# Altium PCB pulseox-main-PCB.PcbDoc
Units mm, origin at the board's own origin, x right, y up, seen from the top; angles counter-clockwise.
Board outline 47.4 x 44.4 mm, 2 copper layers (Top Layer, Bottom Layer); 31 components, 26 nets, 122 pads, 0 vias.
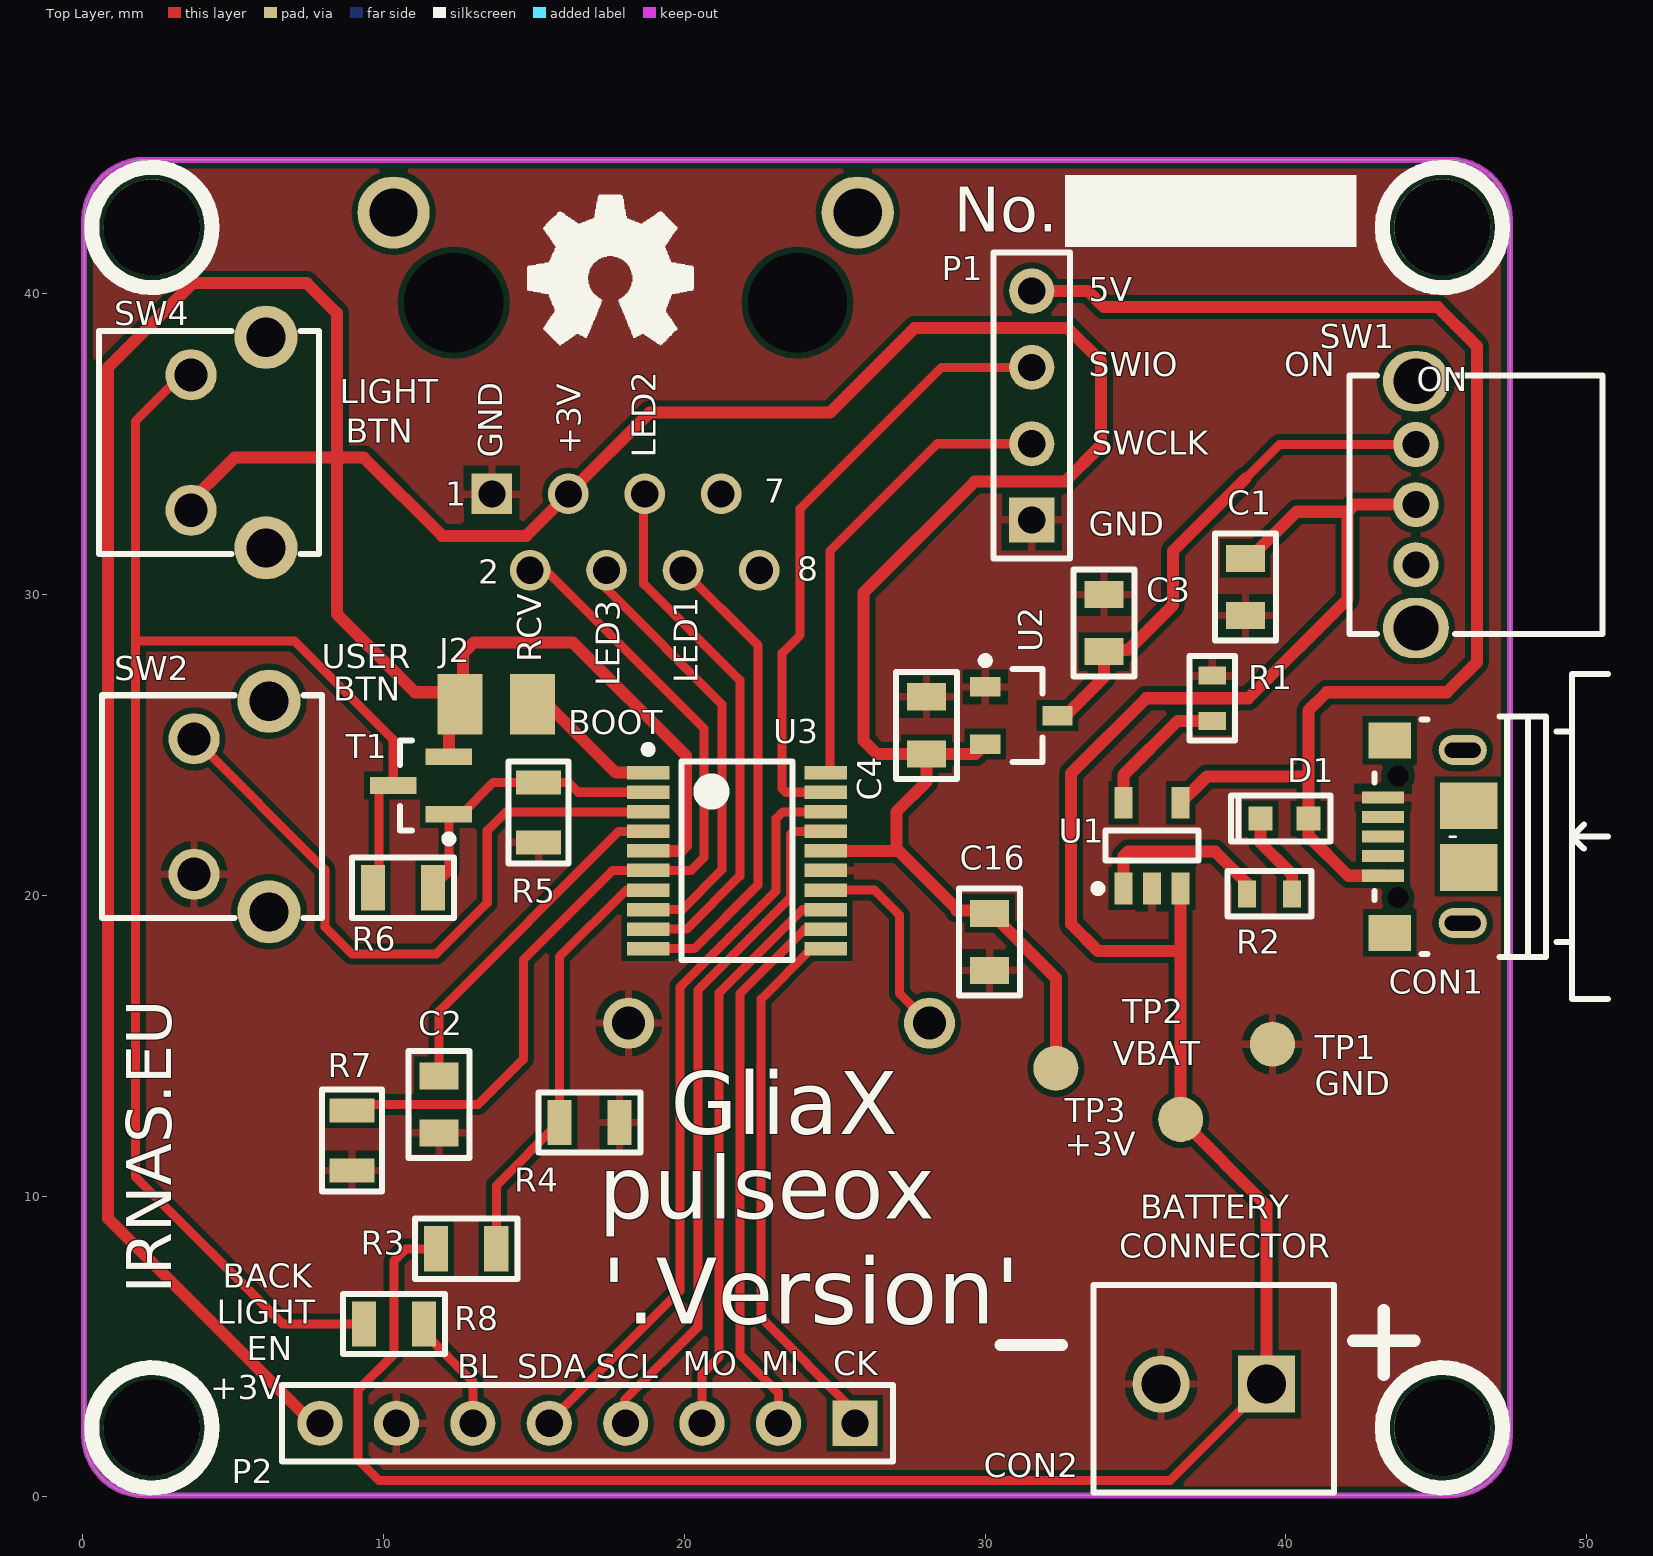
[diagram p0: Top Layer view]
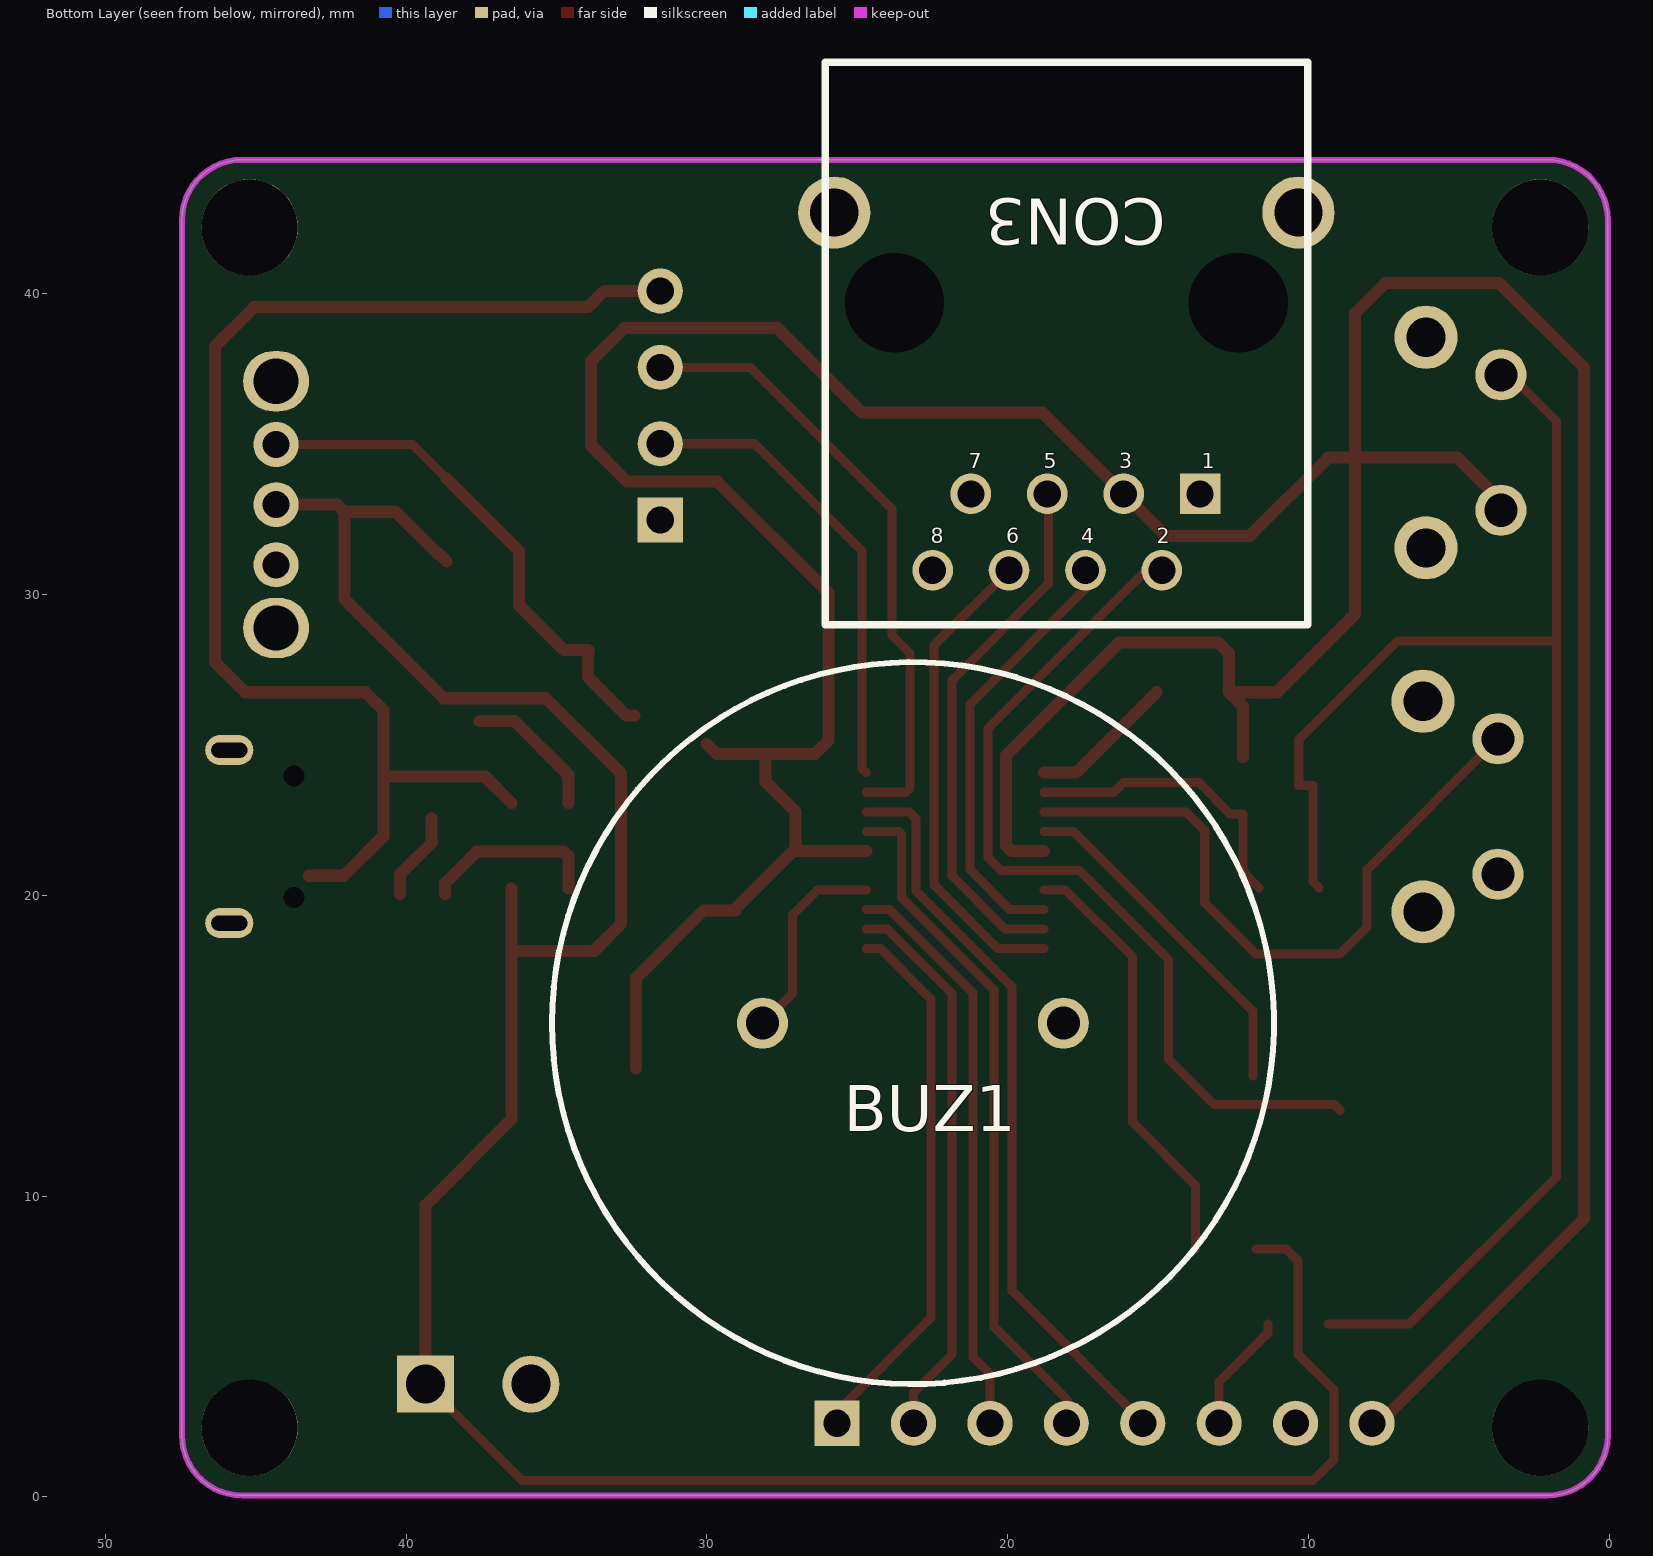
[diagram p1: Bottom Layer view, seen from below]

## Layer stack, top to bottom
Top Solder: solder mask 0.0102, Solder Resist, Dk 3.5
Top Layer: signal copper 0.0356
Dielectric 1: dielectric 0.32, FR-4, Dk 4.8
Bottom Layer: signal copper 0.0356
Bottom Solder: solder mask 0.0102, Solder Resist, Dk 3.5

## Board outline
0.05,2.05 ccw(c2.05,2.05) 2.05,0.05 4.55,0.05 45.45,0.05 ccw(c45.45,2.05) 47.45,2.05 47.45,42.45 ccw(c45.45,42.45) 45.45,44.45 2.05,44.45 ccw(c2.05,42.45) 0.05,42.45

## Design rules (kind name [scope] priority, off if disabled: settings)
Clearance Clearance_gnd [All vs InNet('GND')] p1: gap=0.2 ignorepadtopadclearanceinfootprint=TRUE except(0.1: SMDPad-THPad)
ComponentClearance [All] p1: gap=0 collisioncheckmode=3 verticalgap=0 showdistances=TRUE
DiffPairsRouting DiffPairsRouting_ETH [InDifferentialPairClass('ETH_100')] p1: maxlimit=0.213 minlimit=0.195 mostfreqgap=0.203 toplayer_minwidth=0.249 toplayer_maxwidth=0.274 toplayer_prefwidth=0.251 bottomlayer_mingap=0.203 bottomlayer_minwidth=0.249 bottomlayer_maxwidth=0.274 bottomlayer_prefwidth=0.251 maxuncoupledlength=12.7
DiffPairsRouting DiffPairsRouting_USB [InDifferentialPairClass('USB_90')] p2: maxlimit=0.254 minlimit=0.254 mostfreqgap=0.254 toplayer_minwidth=0.322 toplayer_maxwidth=0.347 toplayer_prefwidth=0.33 bottomlayer_minwidth=0.322 bottomlayer_maxwidth=0.347 bottomlayer_prefwidth=0.33 maxuncoupledlength=12.7
DiffPairsRouting [All] p3: maxlimit=0.254 minlimit=0.152 mostfreqgap=0.254 toplayer_minwidth=0.152 toplayer_maxwidth=0.381 toplayer_prefwidth=0.203 bottomlayer_minwidth=0.152 bottomlayer_maxwidth=0.381 bottomlayer_prefwidth=0.203 maxuncoupledlength=12.7
HoleSize [All] p1: absolutevalues=TRUE maxlimit=5 minlimit=0.3 maxpercent=80.000 minpercent=20.000
MatchedLengths camera [InDifferentialPairClass('CAMERA_DIFF')] p1: tolerance=0.254 checknetsindiffpair=TRUE checkdiffpairvsdiffpair=FALSE checkxsignals=FALSE checkothers=FALSE
MinimumSolderMaskSliver [All] p1: minsoldermaskwidth=0.05
PlaneClearance [InPolygon] p1: clearance=0.8
PlaneConnect [All] p1: planeconnectstyle=Direct reliefexpansion=0.508 reliefentries=2 reliefconductorwidth=0.254 reliefairgap=0.254
PolygonConnect [All] p1: connectstyle=Relief reliefconductorwidth=0.254 reliefentries=4 polygonreliefangle="90 Angle" airgapwidth=0.254
RoutingVias [All] p1: holewidth=0.38 width=0.635 viastyle="Through Hole" minholewidth=0.3 minwidth=0.508 maxholewidth=0.711 maxwidth=1.27
SilkToSolderMaskClearance [IsPad] p1: minsilkscreentomaskgap=0 clearancetoexposedcopper=TRUE
SolderMaskExpansion [All] p1: expansion=0.102
Width [All] p1: maxlimit=2 minlimit=0.152 preferedwidth=0.203 minimp=50.000000 maximp=50.000000 favimp=50.000000
23 further rules are at their usual default settings.

## Components (designator, comment, footprint, x,y, rotation, side; value= is the part's Value field where it differs from the comment)
BUZ1 "AT-2440-TWT-R" BUZZER 23.15,15.75 r0 bottom
C1 "10uF /16V" CAP0805 38.65,30.25 r90 top
C2 "100nF/16V" CAP0805 11.85,13.05 r90 top
C3 "1uF/16" CAP0805 33.95,29.05 r270 top
C4 "1uF/16" CAP0805 28.05,25.65 r270 top
C16 "100nF/16V" CAP0805 30.15,18.45 r90 top
CON1 "microUSB" microUSB-CHINA 44.65,21.95 r90 top
CON2 "Terminal Block, 3.5 mm" "Block Terminal 3.5mm" 39.35,3.75 r180 top
CON3 "PS000036" "eth con" 18.05,36.75 r180 bottom
D1 "LED RED" LED0603 39.95,22.55 r0 top
J2 "Solder jumper" "solder jumper smd" 13.75,26.35 r180 top
P1 "Header 4" HDR1X4 31.55,32.47 r90 top
P2 "Header 8" HDR1X8 25.67,2.45 r180 top
R1 "10k" RES0603 37.55,26.55 r90 top
R2 "1k" RES0603 39.45,20.05 r180 top
R3 "4k7" RES0805 12.75,8.25 r180 top
R4 "10K" RES0805 16.85,12.45 r180 top
R5 "47k" RES0805 15.15,22.75 r90 top
R6 "10K" RES0805 10.65,20.25 r180 top
R7 "10k 0805" RES0805 8.95,11.85 r90 top
R8 "4k7" RES0805 10.35,5.75 r180 top (schematic designator R3)
SW1 "SLIDE SW" SLIDE_SW 44.319,30.986 r90 top
SW2 "PTS645VH58-2LFS" "SW TH ANGLE_2" 4.95,22.95 r270 top
SW4 "FSMRA4JH04" "SW TH ANGLE_1" 4.85,35.05 r270 top
T1 "NX7002BK" SOT23 11.25,23.65 r180 top
TP1 "TP" TP 39.55,15.05 r0 top
TP2 "TP" TP 36.5,12.55 r180 top
TP3 "TP" TP 32.35,14.25 r180 top
U1 "MCP73831T-2ACI/OT" SOT23127P600-8N 35.55,21.65 r90 top
U2 "MCP1700T-3002E/TT" "SOT23127P600-8N - duplicate" 31.204,25.975 r0 top
U3 "STM32F070F6P6" SOP127P600-8N 21.75,21.15 r0 top

## Footprints (in the part's own frame and the unit in brackets; to place one, negate y for a bottom-side part, rotate by r counter-clockwise, add the part's x,y. Pads: shape width x height; smd on the part's side, far side on the other; paste and mask are expansions set on the pad)
"Block Terminal 3.5mm" [mm]
  rect 1.9x1.9 hole 1.3: 1(0,0)
  round 1.9 hole 1.3: 2(3.5,0)
  silkscreen extent -2.25,-3.3 5.75,3.6, body extent -2.25,-3.4 5.75,3.6, height 3.7
BUZZER [mm]
  round 1.7 hole 1.1: 1(-5,0) 2(5,0)
  silkscreen extent -12,-12 12,12, body extent -12,-12 12,12, height 7.31
CAP0805 [mm]
  rect 0.9x1.3 smd: 1(-0.95,0) 2(0.95,0)
  silkscreen extent -1.78,-1.02 1.78,1.02, body extent -1,-0.6 1,0.6, height 1.5
"eth con" [mm]
  rect 1.35x1.35 hole 0.9: 1(4.445,-3.405)
  round 1.35 hole 0.9: 2(3.175,-5.945) 3(1.905,-3.405) 4(0.635,-5.945) 5(-0.635,-3.405) 6(-1.905,-5.945) 7(-3.175,-3.405) 8(-4.445,-5.945)
  round 2.4 hole 1.6: ""(-7.715,5.945) ""(7.715,5.945)
  round 0 hole 3.3 unplated: ""(-5.715,2.945) ""(5.715,2.945)
  silkscreen extent -8.02,-7.75 8.02,10.94, body extent -10.14,-7.92 10.14,13.92, height 15.55
HDR1X4 [mm] "Connector; Header; 4 Position"
  rect 1.5x1.5 hole 0.9: 1(0,0)
  round 1.5 hole 0.9: 2(2.54,0) 3(5.08,0) 4(7.62,0)
  silkscreen extent -1.27,-1.27 8.89,1.27
HDR1X8 [mm] "Connector; Header; 8 Position"
  rect 1.5x1.5 hole 0.9: 1(0,0)
  round 1.5 hole 0.9: 2(2.54,0) 3(5.08,0) 4(7.62,0) 5(10.16,0) 6(12.7,0) 7(15.24,0) 8(17.78,0)
  silkscreen extent -1.27,-1.27 19.05,1.27
LED0603 [mm]
  rect 0.8x0.8 smd: 1(-0.8,0) 2(0.8,0)
  silkscreen extent -1.78,-0.76 1.52,0.76, body extent -0.85,-0.4 0.85,0.4, height 0.66
microUSB-CHINA [mm]
  rect 0.4x1.4 smd mask+0.05: 1(-1.3,1.425) 2(-0.65,1.425) 3(0,1.425) 4(0.65,1.425) 5(1.3,1.425)
  rect 1.2x1.4 smd: 6(-3.2,1.2) 7(3.2,1.2)
  oval 1x1.6 hole 0.5 slot 1.2 at 90 deg: 8(-2.875,-1.225) 9(2.875,-1.225)
  rect 1.55x1.9 smd paste-10: 10(-1.025,-1.425) 11(1.025,-1.425)
  rect 0x0 hole 0.7 unplated: ""(-2.028,0.925) ""(2.022,0.925)
  silkscreen extent -5.4,-6.05 5.4,1.7, body extent -4.04,-3.83 4.04,1.73, height 2.77
RES0603 [mm]
  rect 0.6x0.9 smd: 1(-0.75,0) 2(0.75,0)
  silkscreen extent -1.4,-0.76 1.4,0.76, body extent -0.8,-0.42 0.8,0.42, height 0.8
RES0805 [mm]
  rect 0.8x1.5 smd: 1(-1,0) 2(1,0)
  silkscreen extent -1.7,-1 1.7,1, body extent -1.15,-0.68 1.15,0.68, height 0.76
SLIDE_SW [mm]
  oval 2x2.2 hole 1.5: 0(-2.1,0) 0(6.1,0)
  round 1.5 hole 0.9: 1(0,0) 2(2,0) 3(4,0)
  silkscreen extent -2.3,-6.2 6.3,2.2, body extent -2.3,-6.18 6.31,2.19, height 2.49
"solder jumper smd" [mm]
  rect 1.5x2 smd: 1(-1.2,0) 2(1.2,0)
SOP127P600-8N [mm]
  rect 1.4x0.45 smd: 1(-2.95,2.925) 2(-2.95,2.275) 3(-2.95,1.625) 4(-2.95,0.975) 5(-2.95,0.325) 6(-2.95,-0.325) 7(-2.95,-0.975) 8(-2.95,-1.625) 9(-2.95,-2.275) 10(-2.95,-2.925) 11(2.95,-2.925) 12(2.95,-2.275) 13(2.95,-1.625) 14(2.95,-0.975) 15(2.95,-0.325) 16(2.95,0.325) 17(2.95,0.975) 18(2.95,1.625) 19(2.95,2.275) 20(2.95,2.925)
  silkscreen extent -3.07,-3.3 1.85,3.82, body extent -3.2,-3.3 3.2,3.3, height 1.2
SOT23 [mm]
  rect 1.55x0.55 smd: 1(-0.925,0.95) 2(-0.925,-0.95) 3(0.925,0)
  silkscreen extent -1.05,-1.5 0.7,1.9, body extent -1.25,-1.5 1.25,1.5, height 1.11
SOT23127P600-8N [mm]
  rect 1.05x0.6 smd: 1(-1.425,0.95) 2(-1.425,0) 3(-1.425,-0.95) 4(1.425,-0.95) 5(1.425,0.95)
  silkscreen extent -1.55,-1.55 0.5,1.92, body extent -1.7,-1.55 1.7,1.55, height 1.45
"SOT23127P600-8N - duplicate" [mm]
  rect 1x0.65 smd: 1(-1.2,0.95) 2(-1.2,-0.95) 3(1.2,0)
  silkscreen extent -1.32,-1.55 0.7,1.95, body extent -1.39,-1.53 1.39,1.53, height 1.12
"SW TH ANGLE_1" [mm]
  round 1.7 hole 1.1 paste+0 mask+0: 1(-2.25,-1.245) 2(2.25,-1.245)
  round 2.1 hole 1.3 paste+0 mask+0: 3(-3.5,1.245) 4(3.5,1.245)
  silkscreen extent -3.7,-4.3 3.7,3, body extent -3.7,-8.15 3.7,2.85, height 3.5
"SW TH ANGLE_2" [mm]
  round 1.7 hole 1.1 paste+0 mask+0: 1(-2.25,-1.245) 2(2.25,-1.245)
  round 2.1 hole 1.3 paste+0 mask+0: 3(-3.5,1.245) 4(3.5,1.245)
  silkscreen extent -3.7,-4.3 3.7,3, body extent -3.7,-4.35 3.7,2.95, height 3.5
TP [mm]
  round 1.5 smd: 1(0,0)

## Part data
BUZ1: "AUDIO PIEZO TRANSDUCER 1-30V TH", Current - Supply=1mA, Frequency=4kHz, Manufacturer="PUI Audio, Inc.", Operating Mode="Single Tone", Operating Temperature="-20°C ~ 60°C", Ratings=Washable, Supplier Part Number 1=668-1103-ND, Voltage - Rated=3V, Voltage Range="1 ~ 30V", Approvals=-, Category="Audio Products", ComponentLink1Description=http://www.puiaudio.com/pdf/AT-2440-TWT-R.pdf, ComponentLink1URL=http://www.puiaudio.com/pdf/AT-2440-TWT-R.pdf, Driver Circuitry="Transducer, Externally Driven", Duration=-, Height - Seated (Max)="0.303\" (7.70mm)", Input Type="Peak-Peak Signal", Manufacturer Part Number=AT-2440-TWT-R, Mounting Type="Through Hole", Packaging=Tray, Part Status=Active, Port Location=Top, Pricing 1="1=1.87, 10=1.7, 100=1.36, 500=1.1288, 1000=0.986, 5000=0.884 (USD)", RoHS="RoHS Compliant", Size / Dimension="0.945\" Dia (24.00mm)", Sound Pressure Level (SPL)="80dB @ 3V, 10cm", Stock 1=3028, Supplier 1=Digi-Key, Technology=Piezo, Termination="PC Pins"
C1: "TDK - CGA4J1X5R1C106K125AC - CAP, MLCC, X5R, 10UF, 16V, 0805", Manufacturer=TDK, Manufacturer Part Number=CGA4J1X5R1C106K125AC, Supplier Part Number 1=2210948RL, ComponentLink1Description=http://bcove.me/e1v54mtm, ComponentLink1URL=http://bcove.me/e1v54mtm, ComponentLink2Description=http://www.farnell.com/datasheets/1936565.pdf, ComponentLink2URL=http://www.farnell.com/datasheets/1936565.pdf, ComponentLink3Description=http://www.farnell.com/datasheets/1683658.pdf, ComponentLink3URL=http://www.farnell.com/datasheets/1683658.pdf, Pricing 1="5=0.41, 50=0.146, 250=0.131, 500=0.12, 1000=0.103 (GBP)", RoHS=YES, Stock 1=8974, Supplier 1=Farnell
C2 C16: library part "100nF 16V 0805", "MURATA - GRM219R71C104KA01D - CAP, MLCC, X7R, 0.1UF, 16V, 0805", Capacitance=0.1, Capacitance Tolerance="± 10%", Ceramic Capacitor Case="0805 [2012 Metric]", Dielectric Characteristic=X7, Manufacturer=MURATA, Manufacturer Part Number=GRM219R71C104KA01D, Operating Temperature Max=125, Operating Temperature Min=-55, Supplier Part Number 1=2611934, Voltage Rating=16, Automotive Qualification Standard=-, ComponentLink1Description=http://www.farnell.com/datasheets/2079178.pdf, ComponentLink1URL=http://www.farnell.com/datasheets/2079178.pdf, ComponentLink2Description=http://www.farnell.com/datasheets/1935878.pdf, ComponentLink2URL=http://www.farnell.com/datasheets/1935878.pdf, MSL="MSL 1 - Unlimited", Packaging="Cut Tape", Pricing 1="10=0.0517, 100=0.0335, 500=0.0221, 1000=0.02, 2000=0.0175, 4000=0.0134, 20000=0.0095, 40000=0.0081 (GBP)", Product Range="GRM Series", RoHS=YES, Stock 1=4286, Supplier 1=Farnell, SVHC="No SVHC (17-Dec-2015"
C3 C4: library part "1uF 16V 0805", "MURATA - GRM21BR71C105KA01K - CAP, MLCC, X7R, 1UF, 16V, 0805", Capacitance=1, Capacitance Tolerance="± 10%", Ceramic Capacitor Case="0805 [2012 Metric]", Dielectric Characteristic=X7, Manufacturer=MURATA, Manufacturer Part Number=GRM21BR71C105KA01K, Operating Temperature Max=125, Operating Temperature Min=-55, Supplier Part Number 1=2688536, Voltage Rating=16, Automotive Qualification Standard=-, ComponentLink1Description=http://www.farnell.com/datasheets/2189141.pdf, ComponentLink1URL=http://www.farnell.com/datasheets/2189141.pdf, MSL="MSL 1 - Unlimited", Packaging="Cut Tape", Pricing 1="10=0.0623, 100=0.0388, 500=0.0279, 2500=0.0221, 5000=0.0195, 10000=0.0162, 50000=0.0139, 100000=0.0126 (GBP)", Product Range="GRM Series", RoHS=YES, Stock 1=18829, Supplier 1=Farnell, SVHC="No SVHC (20-Jun-2016"
CON1: library part "Micro USB CHINA 1"
CON2: library part 1776275-2, "TE CONNECTIVITY - 1776275-2 - TERMINAL BLOCK, WIRE TO BRD, 2POS, 18AWG", Colour=Blue, Contact Current Rating=10, Manufacturer="TE CONNECTIVITY", Rated Current=7, Rated Voltage=250, Supplier Part Number 1=1098611, Approval Bodies="CSA, UL", Block Orientation="Through Hole Right Angle", ComponentLink1Description=http://www.farnell.com/datasheets/1899918.pdf, ComponentLink1URL=http://www.farnell.com/datasheets/1899918.pdf, ComponentLink2Description=http://www.farnell.com/cad/2291290.pdf, ComponentLink2URL=http://www.farnell.com/cad/2291290.pdf, ComponentLink3Description=http://www.farnell.com/datasheets/1650926.pdf, ComponentLink3URL=http://www.farnell.com/datasheets/1650926.pdf, ComponentLink4Description=http://www.farnell.com/datasheets/2159487.pdf, ComponentLink4URL=http://www.farnell.com/datasheets/2159487.pdf, Conductor Area CSA=0.9, Connector Mounting="PCB Mount", Connector Type="Terminal Block, PCB", Contact Material=Brass, Contact Plating="Tin Plated Contacts", Lead Spacing=3.5, Manufacturer Part Number=1776275-2, No. of Positions=2, Pitch Spacing=3.5, Pricing 1="1=0.198, 50=0.148, 150=0.141, 250=0.135, 500=0.128, 1500=0.123 (GBP)", Product Range=-, RoHS=Y-EX, Stock 1=22978, Supplier 1=Farnell, SVHC="No SVHC (15-Jun-2015)", Voltage Rating VAC=250, Wire Area Size Max="2.08mm²<!--FANDB--><div class=\"features-and-benefits-container\"><div class=\"features-and-benefits-description\"><span class=\"features-benefits-value\">The 1776275-2 from TE Connectivity is a through hole, 2 position vertical PCB mount terminal block with interlocking. This terminal block comes with 3.5mm pitch spacing and is suitable for wire size ranging from 26AWG to 18", Wire Connection Method=Screw, Wire Size AWG Max=18, Wire Size AWG Min=26
CON3: Manufacturer="Pro Signal", Supplier Part Number 1=2787075, Manufacturer Part Number=PS000036, Stock 1=0, Supplier 1=Farnell
D1: "BROADCOM LIMITED - HSMS-C190 - LED, RED, 10MCD, 626NM", Forward Current If=20, Forward Voltage=2.1, LED Colour=Red, Manufacturer="BROADCOM LIMITED", Manufacturer Part Number=HSMS-C190, Supplier Part Number 1=2497356, Automotive Qualification Standard=-, Bulb Size=-, ComponentLink1Description=http://www.farnell.com/datasheets/313031.pdf, ComponentLink1URL=http://www.farnell.com/datasheets/313031.pdf, ComponentLink2Description=http://www.farnell.com/datasheets/1681524.pdf, ComponentLink2URL=http://www.farnell.com/datasheets/1681524.pdf, ComponentLink3Description=http://www.farnell.com/datasheets/2165483.pdf, ComponentLink3URL=http://www.farnell.com/datasheets/2165483.pdf, LED Mounting=SMD, Lens Shape=Rectangular, Luminous Intensity=10, MSL=-, Packaging="Cut Tape", Pricing 1="1=0.361, 10=0.256, 50=0.235, 100=0.106, 200=0.101 (GBP)", Product Range=-, RoHS=YES, Stock 1=7534, Supplier 1=Farnell, SVHC="No SVHC (17-Dec-2015)<!--FANDB--><div class=\"features-and-benefits-container\"><div class=\"features-and-benefits-description\"><span class=\"features-benefits-value\">The HSMS-C190 is a HER SMD Chip LED with untinted/diffused lens, made of GaP. It is designed in an industry standard package 1.6 x 0.8mm footprint with 0.8mm profile. It is compatible with IR reflow solder processes. The small size and wide viewing angle make this LED prime choices for backlighting applications and front panel illumination especially where space is a premium.</span></div><div class=\"features-and-benefits-list\"><ul class=\"features-and-benefits-list-list\"><li class=\"features-and-benefits-list-item\">Small size</li><li class=\"features-and-benefits-list-item\">Industry standard footprint</li><li class=\"features-and-benefits-list-item\">Compatible with IR solder</li><li class=\"features-and-benefits-list-item\">Diffused optics</li><li class=\"features-and-benefits-list-item\">-40 to 85", Viewing Angle=170°, Wavelength Typ=626
P1: "Header, 4-Pin", LatestRevisionDate=17-Jul-2002, LatestRevisionNote="Re-released for DXP Platform.", Publisher="Altium Limited"
P2: "Header, 8-Pin", LatestRevisionDate=17-Jul-2002, LatestRevisionNote="Re-released for DXP Platform.", Publisher="Altium Limited"
R1: "MULTICOMP - MCMR06X103 JTL - RES, CERAMIC, 10K, 5%, 0.1W, 0603", Manufacturer=MULTICOMP, Manufacturer Part Number="MCMR06X103 JTL", Power Rating=100, Resistance=10, Resistance Tolerance="± 5%", Resistor Case Style="0603 [1608 Metric]", Resistor Element Material=Ceramic, Supplier Part Number 1=2073356, Temperature Coefficient="± 100", Voltage Rating=75, Automotive Qualification Standard="-<!--FANDB--><div class=\"features-and-benefits-container\"><div class=\"features-and-benefits-description\"><span class=\"features-benefits-value\">The Multicomp MCMR series resistors are automotive grade, anti sulphured thick film chip resistor. The resistance range includes E24 and E96 decade values from 1ohm to 10Mohm. These resistors are constructed on top of a high grade ceramic body.</span></div><div class=\"features-and-benefits-list\"><ul class=\"features-and-benefits-list-list\"><li class=\"features-and-benefits-list-item\">EIA 0402, 0603, 0805, 1206 chip sizes available</li><li class=\"features-and-benefits-list-item\">High reliability and stability</li><li class=\"features-and-benefits-list-item\">Automotive grade AEC-Q200 compliant</li><li class=\"features-and-benefits-list-item\">Complaint with (IEC 60068-1) 55/155/56 climatic category</li><li class=\"features-and-benefits-list-item\">Maximum operation voltage of 50V, 75V, 150V and 200V</li><li class=\"features-and-benefits-list-item\">Power rating of 62.5mW, 100mW, 125mW and 250mW</li><li class=\"features-and-benefits-list-item\">Available in ±1% and ±5% tolerance</li><li class=\"features-and-benefits-list-item\">Temperature coefficient (TCR) of +200ppm/°C, +100ppm/°C and -200ppm/°C to +400ppm/°C</li><li class=\"features-and-benefits-list-item\">Operating temperature range -55°C to 155", ComponentLink1Description=http://www.farnell.com/datasheets/1716707.pdf, ComponentLink1URL=http://www.farnell.com/datasheets/1716707.pdf, Packaging="Cut Tape", Pricing 1="10=0.0087, 100=0.0074, 500=0.0061, 1000=0.0048, 2500=0.0032, 5000=0.0024, 25000=0.0016, 50000=0.0013 (GBP)", Product Range="MCMR Series", RoHS=Y-EX, Stock 1=19791, Supplier 1=Farnell
R2: "MULTICOMP - MCMR06X102 JTL - RES, CERAMIC, 1K, 5%, 0.1W, 0603", Manufacturer=MULTICOMP, Manufacturer Part Number="MCMR06X102 JTL", Power Rating=100, Resistance=1, Resistance Tolerance="± 5%", Resistor Case Style="0603 [1608 Metric]", Resistor Element Material=Ceramic, Resistor Mounting="Surface Mount Device<!--FANDB--><div class=\"features-and-benefits-container\"><div class=\"features-and-benefits-description\"><span class=\"features-benefits-value\">The Multicomp MCMR series resistors are automotive grade, anti sulphured thick film chip resistor. The resistance range includes E24 and E96 decade values from 1ohm to 10Mohm. These resistors are constructed on top of a high grade ceramic body.</span></div><div class=\"features-and-benefits-list\"><ul class=\"features-and-benefits-list-list\"><li class=\"features-and-benefits-list-item\">EIA 0402, 0603, 0805, 1206 chip sizes available</li><li class=\"features-and-benefits-list-item\">High reliability and stability</li><li class=\"features-and-benefits-list-item\">Automotive grade AEC-Q200 compliant</li><li class=\"features-and-benefits-list-item\">Complaint with (IEC 60068-1) 55/155/56 climatic category</li><li class=\"features-and-benefits-list-item\">Maximum operation voltage of 50V, 75V, 150V and 200V</li><li class=\"features-and-benefits-list-item\">Power rating of 62.5mW, 100mW, 125mW and 250mW</li><li class=\"features-and-benefits-list-item\">Available in ±1% and ±5% tolerance</li><li class=\"features-and-benefits-list-item\">Temperature coefficient (TCR) of +200ppm/°C, +100ppm/°C and -200ppm/°C to +400ppm/°C</li><li class=\"features-and-benefits-list-item\">Operating temperature range -55°C to 155", Supplier Part Number 1=2073354, Temperature Coefficient="± 100", Voltage Rating=75, Automotive Qualification Standard=-, ComponentLink1Description=http://www.farnell.com/datasheets/1716707.pdf, ComponentLink1URL=http://www.farnell.com/datasheets/1716707.pdf, Packaging="Cut Tape", Pricing 1="10=0.0089, 100=0.0076, 500=0.0063, 1000=0.0049, 2500=0.0033, 5000=0.0024, 25000=0.0016, 50000=0.0013 (GBP)", Product Range="MCMR Series", RoHS=Y-EX, Stock 1=18133, Supplier 1=Farnell
R3 R8: library part "4k7 1% 0805", "VISHAY - CRCW08054K70FKEA - RES, THICK FILM, 4K7, 1%, 0.125W, 0805", Manufacturer=VISHAY, Manufacturer Part Number=CRCW08054K70FKEA, Power Rating=125, Resistance=4.7, Resistance Tolerance="± 1%", Resistor Case Style="0805 [2012 Metric]", Resistor Element Material="Thick Film", Resistor Mounting="Surface Mount Device<!--FANDB--><div class=\"features-and-benefits-container\"><div class=\"features-and-benefits-description\"><span class=\"features-benefits-value\">The Vishay D/CRCW e3 series are standard thick film chip resistors. The resistance range includes E96 and E24 decade values from 1ohm to 10Mohm. CRCW e3 series resistors have a pure tin solder contacts on the Ni barrier layer that provides compatibility with reflow soldering process.</span></div><div class=\"features-and-benefits-list\"><ul class=\"features-and-benefits-list-list\"><li class=\"features-and-benefits-list-item\">Automotive grade AEC-Q200 qualified</li><li class=\"features-and-benefits-list-item\">EIA 0402, 0603, 0805, 1206, 1210, 1218, 2010, 2512 standard case sizes available</li><li class=\"features-and-benefits-list-item\">Stability &Delta", Supplier Part Number 1=1469923, Temperature Coefficient="± 100", Voltage Rating=150, Automotive Qualification Standard=AEC-Q200, ComponentLink1Description=http://www.vishay.com/docs/20014/smdpack.pdf, ComponentLink1URL=http://www.vishay.com/docs/20014/smdpack.pdf, ComponentLink2Description=http://www.farnell.com/datasheets/2310790.pdf, ComponentLink2URL=http://www.farnell.com/datasheets/2310790.pdf, ComponentLink3Description=http://www.farnell.com/cad/1552998.zip, ComponentLink3URL=http://www.farnell.com/cad/1552998.zip, MSL="MSL 1 - Unlimited", Packaging="Cut Tape", Pricing 1="10=0.0557, 100=0.0223, 500=0.0187, 1000=0.0086, 2500=0.0064 (GBP)", Product Range="CRCW Series", RoHS=Y-EX, Stock 1=3035, Supplier 1=Farnell
R4 R6: library part "10K 1% 0805_1", "WALSIN - WR08X1002FTL - RES, THICK FILM, 10K, 1%, 150V, 0805", Manufacturer=WALSIN, Manufacturer Part Number=WR08X1002FTL, Power Rating=125, Resistance=10, Resistance Tolerance="± 1%", Resistor Case Style="0805 [2012 Metric]", Resistor Element Material="Thick Film", Supplier Part Number 1=2502671, Temperature Coefficient="± 100", Voltage Rating=150, Automotive Qualification Standard=-, ComponentLink1Description=http://www.farnell.com/datasheets/1960319.pdf, ComponentLink1URL=http://www.farnell.com/datasheets/1960319.pdf, MSL="MSL 2 - 1 year<!--FANDB--><div class=\"features-and-benefits-container\"><div class=\"features-and-benefits-description\"><span class=\"features-benefits-value\">The WR08 series resistors from Walsin are thick film general purpose chip resistors. These resistors are constructed in a high grade ceramic body (aluminium oxide).</span></div><div class=\"features-and-benefits-list\"><ul class=\"features-and-benefits-list-list\"><li class=\"features-and-benefits-list-item\">Resistance range includes E24 and E96 decade values from 1ohm to 10Mohm</li><li class=\"features-and-benefits-list-item\">EIA 0805 case size</li><li class=\"features-and-benefits-list-item\">Available in ?±100ppm/°C and -200ppm/°C to +400ppm/°C TCR values</li><li class=\"features-and-benefits-list-item\">Available in ±1% and ±5% tolerance</li><li class=\"features-and-benefits-list-item\">High reliability and stability</li><li class=\"features-and-benefits-list-item\">Higher component and equipment reliability</li><li class=\"features-and-benefits-list-item\">Lower assembly costs</li><li class=\"features-and-benefits-list-item\">Continuous working voltage is 150V and rated power is 125", Packaging="Cut Tape", Pricing 1="10=0.0208, 100=0.0069, 500=0.0042, 1000=0.003, 2500=0.0023 (GBP)", Product Range="WR08 Series", RoHS=YES, Stock 1=45511, Supplier 1=Farnell
R5: library part "47k 1% 0805", "WELWYN - WCR0805-47KFI - RES, THICK FILM, 47K, 1%, 0.125W, 0805", Insulation Resistance=1000, Manufacturer=WELWYN, Manufacturer Part Number=WCR0805-47KFI, Operating Temperature Max=155, Operating Temperature Min=-55, Operating Temperature Range="-55°C to +155", Power Rating=125, Proof Voltage=500, Resistance=47, Resistance Tolerance="± 1%", Resistor Case Style="0805 [2012 Metric]", Resistor Element Material="Thick Film", Resistor Mounting="Surface Mount Device", Supplier Part Number 1=1099812, Temperature Coefficient="± 100", Voltage Rating=150, Automotive Qualification Standard=AEC-Q200, ComponentLink1Description=http://www.farnell.com/datasheets/2331353.pdf, ComponentLink1URL=http://www.farnell.com/datasheets/2331353.pdf, External Depth=0.55, External Length / Height=2, External Width=1.25, No. of Pins=2, Packaging="Cut Tape", Pricing 1="10=0.0208, 100=0.0156, 500=0.0115, 1000=0.01, 2500=0.0088 (GBP)", Product Range="WCR Series", Reel Quantity=5000, RoHS=YES, Stock 1=26620, Supplier 1=Farnell, SVHC="No SVHC (15-Jun-2015)", Tape Width=8
R7: "MULTICOMP         MCWR08X1002FTL            Surface Mount Chip Resistor, Thick Film, MCWR Series, 10 kohm, 125 mW,  1%, 150 V", Case/Package=0805, Case Code (Metric)=2012, Manufacturer=Multicomp, Manufacturer Part Number=MCWR08X1002FTL, Power Rating=125mW, Resistance=10kR, Supplier Part Number 1=2446870, Temperature Coefficient=100ppm/°C, Tolerance=1%, Voltage Rating=150V, Case Code (Imperial)=0805, ComponentLink1Description=https://datasheet.ciiva.com/46381/1849611-46381605.pdf, ComponentLink1URL=https://datasheet.ciiva.com/46381/1849611-46381605.pdf, Composition="Thick Film", Mount="Surface Mount", Packaging="Cut Tape", Pricing 1="5000=0.0013, 25000=0.0011 (EUR)", REACH SVHC=Unknown, Stock 1=2925000, Supplier 1=Farnell, Voltage Rating (DC)=150V
SW1: "C & K COMPONENTS - OS102011MA1QS1 - SWITCH SLIDE SHORTING SPDT", Contact Current Max=100, Contact Voltage AC Max=-, Contact Voltage DC Max=12, Manufacturer="C & K COMPONENTS", Manufacturer Part Number=OS102011MA1QS1, Supplier Part Number 1=2435103, ComponentLink1Description=http://www.farnell.com/datasheets/1839844.pdf, ComponentLink1URL=http://www.farnell.com/datasheets/1839844.pdf, Contact Configuration=SPDT, Orientation="Right Angle", Pricing 1="1=0.3, 75=0.251, 150=0.244, 250=0.2, 500=0.196, 1500=0.192, 2500=0.188, 5000=0.184 (GBP)", Product Range=-, RoHS=YES, Stock 1=1781, Supplier 1=Farnell, SVHC="No SVHC (20-Jun-2016)<!--FANDB--><div class=\"features-and-benefits-container\"><div class=\"features-and-benefits-description\"><span class=\"features-benefits-value\">The OS102011MA1QS1 is a Miniature Slide Switch features a new high-temperature option for lead-free soldering. Designed with a variety of actuators and terminations, the miniature slide switches are ideal for thermostat applications, as well as test and measurement equipment, computer peripherals and consumer products.</span></div><div class=\"features-and-benefits-list\"><ul class=\"features-and-benefits-list-list\"><li class=\"features-and-benefits-list-item\">SPDT Contact Configuration</li><li class=\"features-and-benefits-list-item\">Variety of Actuators and Terminations</li><li class=\"features-and-benefits-list-item\">PC and Panel Mounting</li><li class=\"features-and-benefits-list-item\">Silver Contact Plating</li><li class=\"features-and-benefits-list-item\">Shorting Contacts</li><li class=\"features-and-benefits-list-item\">Halogen-free Material</li></ul></div><div class=\"features-and-benefits-applications\"><ul class=\"features-and-benefits-value\"><li class=\"features-and-benefits-list-item\">Test & Measurement</li><li class=\"features-and-benefits-list-item\">Computers & Computer Peripherals</li><li class=\"features-and-benefits-list-item\">Communications & Networking</li><li class=\"features-and-benefits-list-item\">Consumer Electronics</li></ul></div></div>", Switch Mounting="Through Hole", Switch Operation=On-On
SW2: "SWITCH TACTILE SPST-NO 0.05A 12V", Colour=Black, Current Rating=50mA, Manufacturer="ITT C&K", Max Operating Temperature=60°C, Min Operating Temperature=-20°C, Operating Force=200gf, Package Quantity=1000, Supplier Part Number 1=2320088, Voltage Rating (DC)=12V, Actuator Material=Nylon,Polyamide, ComponentLink1Description=https://datasheet.ciiva.com/29903/getdatasheetpartid-780336-29903805.pdf, ComponentLink1URL=https://datasheet.ciiva.com/29903/getdatasheetpartid-780336-29903805.pdf, ComponentLink2Description=https://datasheet.ciiva.com/22637/1707731-22637360.pdf, ComponentLink2URL=https://datasheet.ciiva.com/22637/1707731-22637360.pdf, Contact Material=Brass,Silver, Contact Plating=Silver, Depth=9.8mm, Illumination Type=Non-Illuminated,Illuminated, Lead Free="Lead Free", Length=8.5mm, Manufacturer Part Number=PTS645VH58-2LFS, Max Current Rating=50mA, Mechanical Life=100000Cycles, Mount="Through Hole", Orientation="Right Angle", Packaging=Bulk, Pricing 1="1=0.189, 10=0.175, 50=0.165, 100=0.141, 300=0.135, 700=0.107, 2000=0.105, 7000=0.103 (GBP)", REACH SVHC="No SVHC", Stock 1=7080, Supplier 1=Farnell, Switch Function=Off-Mom, Termination="PC Pins", Throw Configuration=SPST
SW4: "TE CONNECTIVITY         FSMRA4JH04             Tactile Switch, Non Illuminated, 1.57 N, 24 V, 50 mA, Solder, FSMRAJ Series", Contact Current Rating=50mA, Manufacturer="TE Connectivity", Max Operating Temperature=85°C, Min Operating Temperature=-35°C, Operating Force=1.6N, Package Quantity=1000, Supplier Part Number 1=1813692, Voltage Rating=24V, Actuator Length=5.74mm, ComponentLink1Description=https://datasheet.ciiva.com/5809/606398-5809313.pdf, ComponentLink1URL=https://datasheet.ciiva.com/5809/606398-5809313.pdf, ComponentLink2Description=https://datasheet.ciiva.com/7635/606398-7635446.pdf, ComponentLink2URL=https://datasheet.ciiva.com/7635/606398-7635446.pdf, Contact Material="Copper Alloy", Current Rating=50mA, Illumination Type=Illuminated, Length=7.11mm, Manufacturer Part Number=FSMRA4JH04, Mechanical Life=100000Cycles, Mount="Through Hole,PCB", Packaging=Bulk, Pricing 1="1=0.15, 500=0.142, 1000=0.117, 5000=0.115, 10000=0.112 (EUR)", REACH SVHC=Unknown, Stock 1=19101, Supplier 1=Farnell, Termination=Solder, Throw Configuration=SPST, Voltage Rating (DC)=24V, Width=7.01mm
T1: "NEXPERIA - NX7002BK - MOSFET, N-CH, 60V, 0.27A, SOT-23-3", Continuous Drain Current Id=270, Drain Source Voltage Vds=60, Manufacturer=NEXPERIA, On Resistance Rds(on)=2.2, Operating Temperature Max=150, Power Dissipation Pd=310, Rds(on) Test Voltage Vgs=10, Supplier Part Number 1=2469640, Threshold Voltage Vgs=1.6, Transistor Case Style=SOT-23, Automotive Qualification Standard=-, ComponentLink1Description=http://www.farnell.com/datasheets/1970559.pdf, ComponentLink1URL=http://www.farnell.com/datasheets/1970559.pdf, Manufacturer Part Number=NX7002BK, MSL="MSL 1 - Unlimited", No. of Pins=3, Pricing 1="1=0.0468, 25=0.0379, 100=0.0268, 250=0.0233, 500=0.0212, 1000=0.0189 (GBP)", Product Range=-, RoHS=YES, Stock 1=2195, Supplier 1=Farnell, SVHC="No SVHC (17-Dec-2015", Transistor Polarity="N Channel"
U1: "MICROCHIP - MCP73831T-2ACI/OT - LI-ION/LI-POLY CHARGE CONTROLLER", Manufacturer=MICROCHIP, Supplier Part Number 1=1332158, ComponentLink1Description=http://www.farnell.com/datasheets/2124927.pdf, ComponentLink1URL=http://www.farnell.com/datasheets/2124927.pdf, ComponentLink2Description=http://www.farnell.com/cad/1545964.zip, ComponentLink2URL=http://www.farnell.com/cad/1545964.zip, Manufacturer Part Number=MCP73831T-2ACI/OT, Pricing 1="1=0.476, 10=0.407, 25=0.385, 50=0.361, 100=0.336 (GBP)", RoHS=YES, Stock 1=39052, Supplier 1=Farnell
U2: "MICROCHIP - MCP1700T-3002E/TT - IC, LDO REGULATOR, 0.25A, 6V, SOT23-3", Manufacturer=MICROCHIP, Supplier Part Number 1=1331482, ComponentLink1Description=http://www.farnell.com/datasheets/1784514.pdf, ComponentLink1URL=http://www.farnell.com/datasheets/1784514.pdf, ComponentLink2Description=http://www.farnell.com/cad/1545350.zip, ComponentLink2URL=http://www.farnell.com/cad/1545350.zip, ComponentLink3Description=http://www.farnell.com/datasheets/2289014.pdf, ComponentLink3URL=http://www.farnell.com/datasheets/2289014.pdf, Manufacturer Part Number=MCP1700T-3002E/TT, Pricing 1="1=0.323, 10=0.296, 25=0.272, 50=0.247, 100=0.224 (GBP)", RoHS=YES, Stock 1=35318, Supplier 1=Farnell
U3: "STMICROELECTRONICS         STM32F070F6P6             32 Bit Microcontroller, Value Line, ARM Cortex-M0, 48 MHz, 32 KB, 6 KB, 20 Pins, TSSOP", Case/Package=TSSOP, Frequency=48MHz, Manufacturer=STMicroelectronics, Max Operating Temperature=85°C, Max Power Dissipation=263mW, Max Supply Voltage=3.6V, Min Operating Temperature=-40°C, Min Supply Voltage=2.4V, Supplier Part Number 1=2488284, ComponentLink1Description=http://www.mouser.com/ds/2/389/stm32f070c6-956182.pdf, ComponentLink1URL=http://www.mouser.com/ds/2/389/stm32f070c6-956182.pdf, ComponentLink2Description=http://www.farnell.com/datasheets/1943789.pdf, ComponentLink2URL=http://www.farnell.com/datasheets/1943789.pdf, ComponentLink3Description=http://www.st.com/st-web-ui/static/active/en/resource/technical/document/datasheet/DM00141386.pdf, ComponentLink3URL=http://www.st.com/st-web-ui/static/active/en/resource/technical/document/datasheet/DM00141386.pdf, Contact Plating=Nickel,Gold, Core Architecture=ARM, Data Bus Width=32b, Interface=I2C,SPI,USB,USART, Lead Free="Lead Free", Manufacturer Part Number=STM32F070F6P6, Max Frequency=48MHz, Memory Size=32KB, Memory Type=FLASH, Mount="Surface Mount", Number of I/Os=15, Number of Pins=20, Number of Programmable I/O=15, Number of Timers/Counters=5, Pricing 1="1=2.11, 25=1.78, 50=1.74, 100=1.35, 250=1.31, 500=1.13, 1000=0.878, 2500=0.786 (EUR)", RAM Size=6KB, REACH SVHC="No SVHC", Stock 1=6108, Supplier 1=Farnell, Watchdog Timer=Yes

## Free pads (board coordinates)
  round 3.2 hole 3.2 unplated: 0(2.3,2.3) 0(2.3,42.2) 0(45.2,2.3) 0(45.2,42.2)

## Nets (pads, with @x,y where several pads share a name; then routed paths per layer and width w, separated by ;. In a path a pad name is that pad's centre, name@x,y a point inside that pad or via, vN(x,y) a via of type N, cw(c..) or ccw(c..) an arc to the next point about the centre after c; other vN are vias at no path point)
+3V: C4.2 C16.2 CON3.3 J2.2 P2.8 SW4.2 T1.2 TP3.1 U2.2 U3.5 U3.16 | length 156.2
  Top Layer w0.4: SW4.2@3.25,32.75 5.05,34.55 8.45,34.55 ; P2.8 7.65,2.45 0.85,9.25 0.85,37.55 3.65,40.35 7.45,40.35 8.45,39.35 8.45,34.55 ; T1.2 12.175,26.275 J2.2@12.65,26.75 ; U3.5 19.875,21.475 20.05,21.65 20.05,24.65 16.295,28.405 13.005,28.405 12.65,28.05 J2.2@12.65,26.75 ; U3.16 27.125,21.475 29.05,19.55 ; U2.2 29.679,24.7 C4.2 ; TP3.1 32.35,17.25 30.1,19.5 29.05,19.5 29.05,19.55 ; 8.45,34.55 9.35,34.55 11.95,31.95 14.75,31.95 CON3.3 18.85,36.05 24.85,36.05 27.65,38.85 32.75,38.85 33.85,37.75 33.85,34.95 32.65,33.75 29.65,33.75 25.95,30.05 25.95,25.15 26.4,24.7 C4.2 ; 8.45,34.55 8.45,29.35 11.05,26.75 J2.2@12.65,26.75 ; C4.2 28.05,23.773 27.05,22.773 27.05,21.55 29.05,19.55
B_LIGHT: P2.6 R6.2 R8.1 R8.2 SW4.1 T1.3 | length 56.9
  Top Layer w0.3: 1.75,28.45 7.05,28.45 10.325,25.175 T1.3 9.85,23.65 9.85,20.45 R6.2 ; SW4.1@3.25,37.25 1.75,35.75 1.75,10.65 6.65,5.75 R8.2 ; R8.1 11.35,5.45 12.97,3.83 P2.6 12.93,2.49 P2.6@12.93,1.85
BOOT0: J2.1 U3.1 | length 4.9
  Top Layer w0.4: J2.1@15.05,26.75 17.725,24.075 U3.1
BUZZER: BUZ1.2 U3.14 | length 6.8
  Top Layer w0.3: U3.14 26.325,20.175 27.15,19.35 27.15,16.75 BUZ1.2
GND: BUZ1.1 C1.1 C2.1 C3.1 C4.1 C16.1 CON1.5 CON2.2 CON3.1 P1.1 P2.7 R1.2 R4.1 R5.1 R7.1 SW2.2 TP1.1 U1.2 U2.1 U3.15
LED1: CON3.6 U3.10 | length 16
  Top Layer w0.3: U3.10 20.325,18.225 22.45,20.35 22.45,28.31 CON3.6
LED2: CON3.5 U3.9 | length 17.8
  Top Layer w0.3: CON3.5 18.65,33.31 18.65,30.35 21.85,27.15 21.85,20.65 20.075,18.875 U3.9
LED3: CON3.4 U3.8 | length 14.5
  Top Layer w0.3: CON3.4 17.415,30.185 21.25,26.35 21.25,20.85 19.925,19.525 U3.8
NetC3_2: C3.2 SW1.3 U2.3 | length 17.2
  Top Layer w0.3: 38.65,33.85 39.786,34.986 SW1.3
  Top Layer w0.4: U2.3 32.675,25.975 33.95,27.25 C3.2 ; C3.2@33.925,28.125 33.95,28.15 34.75,28.15 36.25,29.65 36.25,31.45 38.65,33.85
NetD1_1: D1.1 R2.1 | length 2.9
  Top Layer w0.4: D1.1 39.15,21.75 40.2,20.7 R2.1
NetR1_1: R1.1 U1.5 | length 4.6
  Top Layer w0.4: U1.5 34.6,24 36.4,25.8 R1.1
NetR2_2: R2.2 U1.1 | length 6
  Top Layer w0.4: U1.1 34.6,21.3 34.75,21.45 37.65,21.45 38.7,20.4 R2.2
PA5/SCK: P2.1 U3.11 | length 18.8
  Top Layer w0.3: U3.11 24.225,18.225 22.55,16.55 22.55,5.95 25.63,2.87 P2.1@25.63,1.85
PA6/MISO: P2.2 U3.12 | length 19.1
  Top Layer w0.3: P2.2@23.09,1.85 P2.2@23.09,2.45 ; P2.2 23.13,3.47 21.85,4.75 21.85,16.728 23.997,18.875 U3.12
PA7/MOSI: P2.3 U3.13 | length 19.7
  Top Layer w0.3: P2.3@20.55,1.85 P2.3@20.87,2.17 ; P2.3 20.59,4.09 21.15,4.65 21.15,16.75 23.925,19.525 U3.13
PA9/SCL: P2.4 U3.17 | length 23.7
  Top Layer w0.3: P2.4@18.01,1.85 18.01,3.21 20.45,5.65 20.45,16.85 23.525,19.925 23.525,22.025 23.625,22.125 U3.17
PA10/SDA: P2.5 U3.18 | length 25.6
  Top Layer w0.3: P2.5@15.47,1.85 15.47,2.47 19.85,6.85 19.85,16.95 23.05,20.15 23.05,22.55 23.275,22.775 U3.18
PF1/BL: R5.2 R6.1 T1.1 U3.2 | length 9.9
  Top Layer w0.3: R6.1 12.175,20.775 T1.1 12.6,22.7 13.65,23.75 14.95,23.75 16.15,23.75 16.475,23.425 U3.2
RCV2: CON3.2 R7.2 U3.6 | length 29.4
  Top Layer w0.3: R7.2 9.15,13.05 13.15,13.05 14.65,14.55 14.65,17.85 17.625,20.825 U3.6 20.225,20.825 20.65,21.25 20.65,25.55 15.395,30.805 CON3.2
RST_BTN: C2.2 U3.4 | length 11.6
  Top Layer w0.3: C2.2 11.85,16.15 17.825,22.125 U3.4
SWCK: P1.2 U3.20 | length 15.6
  Top Layer w0.3: U3.20 24.85,24.225 24.85,31.45 28.41,35.01 P1.2
SWIO: P1.3 U3.19 | length 20.7
  Top Layer w0.3: U3.19 23.375,23.425 23.25,23.55 23.25,28.05 23.85,28.65 23.85,32.85 28.55,37.55 P1.3
USR_BTN: SW2.1 U3.3 | length 22.5
  Top Layer w0.3: SW2.1 8.05,20.855 8.05,18.95 8.95,18.05 11.75,18.05 13.45,19.75 13.45,22.15 14.075,22.775 U3.3
VBAT: C1.2 CON2.1 R3.2 SW1.2 TP2.1 U1.3 | length 88.2
  Top Layer w0.3: R3.2 10.75,8.25 10.35,7.85 10.35,4.75 9.15,3.55 9.15,1.25 9.85,0.55 36.15,0.55 CON2.1
  Top Layer w0.4: U1.3 36.5,18.15 ; C1.2@38.65,31.1 38.95,31.4 38.95,31.35 40.35,32.75 42.05,32.75 ; CON2.1 39.35,9.7 TP2.1 36.5,18.15 ; SW1.2 42.286,32.986 42.05,32.75 ; 36.5,18.15 33.75,18.15 32.85,19.05 32.85,24.05 35.35,26.55 38.75,26.55 42.05,29.85 42.05,32.75
VBAT_A: R3.1 R4.2 U3.7 | length 14.4
  Top Layer w0.3: R3.1 13.75,10.35 R4.2 15.85,17.95 18.075,20.175 U3.7
VUSB: CON1.1 D1.2 P1.4 U1.4 | length 44.1
  Top Layer w0.4: P1.4 33.41,40.09 33.95,39.55 45.05,39.55 46.35,38.25 46.35,27.75 45.35,26.75 41.35,26.75 40.75,26.15 40.75,23.95 ; U1.4 37.375,23.95 40.75,23.95 ; CON1.1 42.073,20.65 40.75,21.973 D1.2 40.75,23.95
pads on no net: CON1. CON1.2 CON1.3 CON1.4 CON1.6 CON1.7 CON1.8 CON1.9 CON1.10 CON1.11 CON3. CON3.7 CON3.8 SW1.0 SW1.1 SW2.3 SW2.4 SW4.3 SW4.4

## Polygon pours and split planes (outlines as drawn)
GND on Top Layer "GND T" (solid, remove dead copper, pour order 4): 0.05,2.05 ccw(c2.05,2.05) 2.05,0.05 4.55,0.05 45.45,0.05 ccw(c45.45,2.05) 47.45,2.05 47.45,42.45 ccw(c45.45,42.45) 45.45,44.45 2.05,44.45 ccw(c2.05,42.45) 0.05,42.45

## Keep-outs
Keep-Out Layer:
  lines w0.2: 45.45,0.05 ccw(c45.45,2.05) 47.45,2.05 47.45,42.45 ccw(c45.45,42.45) 45.45,44.45 2.05,44.45 ccw(c2.05,42.45) 0.05,42.45 0.05,2.05 ccw(c2.05,2.05) 2.05,0.05 4.55,0.05 42.95,0.05 45.45,0.05 ; 45.45,0.05 45.45,0.05

## Silkscreen, mask and mechanical layers (free items; w line width, h text height)
Top Overlay:
  drawing of 364 lines, arcs and shapes, not listed
  text "No." at 28.95,42.05 h1.5
  text "5V" at 33.45,39.75 h0.8
  text "SWIO" at 33.45,37.25 h0.8
  text "ON" at 39.95,37.25 h0.8
  text "ON" at 44.35,36.75 h0.8
  text "LIGHT" at 8.55,36.35 h0.8
  text "BTN" at 8.75,35.05 h0.8
  text "+3V" at 16.55,34.65 h0.8 r90
  text "SWCLK" at 33.55,34.65 h0.8
  text "GND" at 13.95,34.55 h0.8 r90
  text "LED2" at 19.05,34.55 h0.8 r90
  text "7" at 22.65,33.05 h0.8
  text "1" at 12.05,32.95 h0.8
  text "GND" at 33.45,31.95 h0.8
  text "8" at 23.75,30.45 h0.8
  text "2" at 13.15,30.35 h0.8
  text "RCV" at 15.25,27.75 h0.8 r90
  text "USER" at 7.95,27.55 h0.8
  text "LED1" at 20.45,27.05 h0.8 r90
  text "LED3" at 17.85,26.95 h0.8 r90
  text "BTN" at 8.338,26.462 h0.8
  text "BOOT" at 16.15,25.35 h0.8
  text "VBAT" at 34.25,14.35 h0.8
  text "GND" at 40.95,13.35 h0.8
  text "GliaX" at 19.55,12.05 h2.1
  text "+3V" at 32.65,11.35 h0.8
  text "pulseox" at 17.15,9.25 h2.1
  text "BATTERY" at 35.15,9.25 h0.8
  text "CONNECTOR" at 34.45,7.95 h0.8
  text "BACK" at 4.65,6.95 h0.8
  text "IRNAS.EU" at 2.95,6.75 h1.5 r90
  text "LIGHT" at 4.45,5.75 h0.8
  text "'.Version'" at 17.25,5.75 h2.2
  text "EN" at 5.45,4.55 h0.8
  text "MO" at 19.95,4.05 h0.8
  text "MI" at 22.55,4.05 h0.8
  text "CK" at 24.95,4.05 h0.8
  text "BL" at 12.45,3.95 h0.8
  text "SDA" at 14.45,3.95 h0.8
  text "SCL" at 17.05,3.95 h0.8
  text "+3V" at 4.25,3.25 h0.8
Mechanical 1:
  lines w0.2: 4.55,0.05 4.55,4.25 42.95,4.25 42.95,0.05

## Dimensions
42.95,0.05 to 42.95,4.25 on Mechanical 1
45.2,42.2 to 2.3,42.2 on Mechanical 1
0.05,42.45 to 47.45,42.45 on Mechanical 1
2.05,0.05 to 2.05,44.45 on Mechanical 1
2.3,42.2 to 2.3,2.3 on Mechanical 1

## Text inside footprints (layer, text, board x,y; h text height)
CON3: Bottom Overlay "1" at 13.55,34.195 h0.5; Bottom Overlay "2" at 15.05,31.695 h0.5; Bottom Overlay "4" at 17.55,31.695 h0.5; Bottom Overlay "5" at 18.8,34.195 h0.5; Bottom Overlay "6" at 20.05,31.695 h0.5; Bottom Overlay "7" at 21.3,34.195 h0.5; Bottom Overlay "8" at 22.55,31.695 h0.5; Bottom Overlay "3" at 16.3,34.195 h0.5